# Altium PCB LD0.PcbDoc
Units mm, origin at the board's own origin, x right, y up, seen from the top; angles counter-clockwise.
Board outline 14.35 x 7.11 mm, 2 copper layers (Top Layer, Bottom Layer); 5 components, 3 nets, 13 pads, 20 vias.
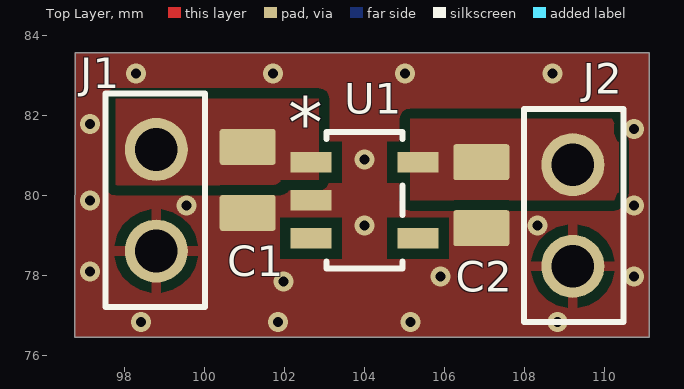
[diagram p0: Top Layer view]
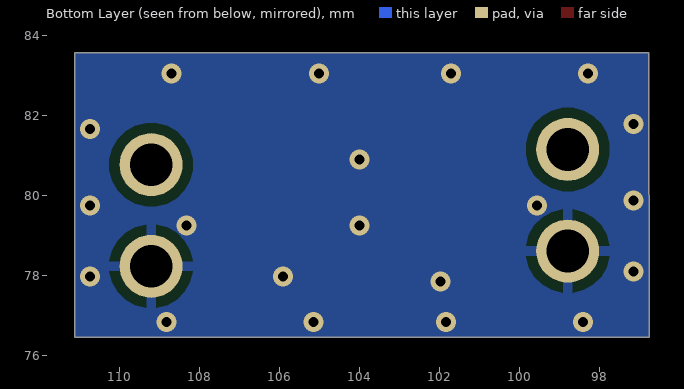
[diagram p1: Bottom Layer view, seen from below]
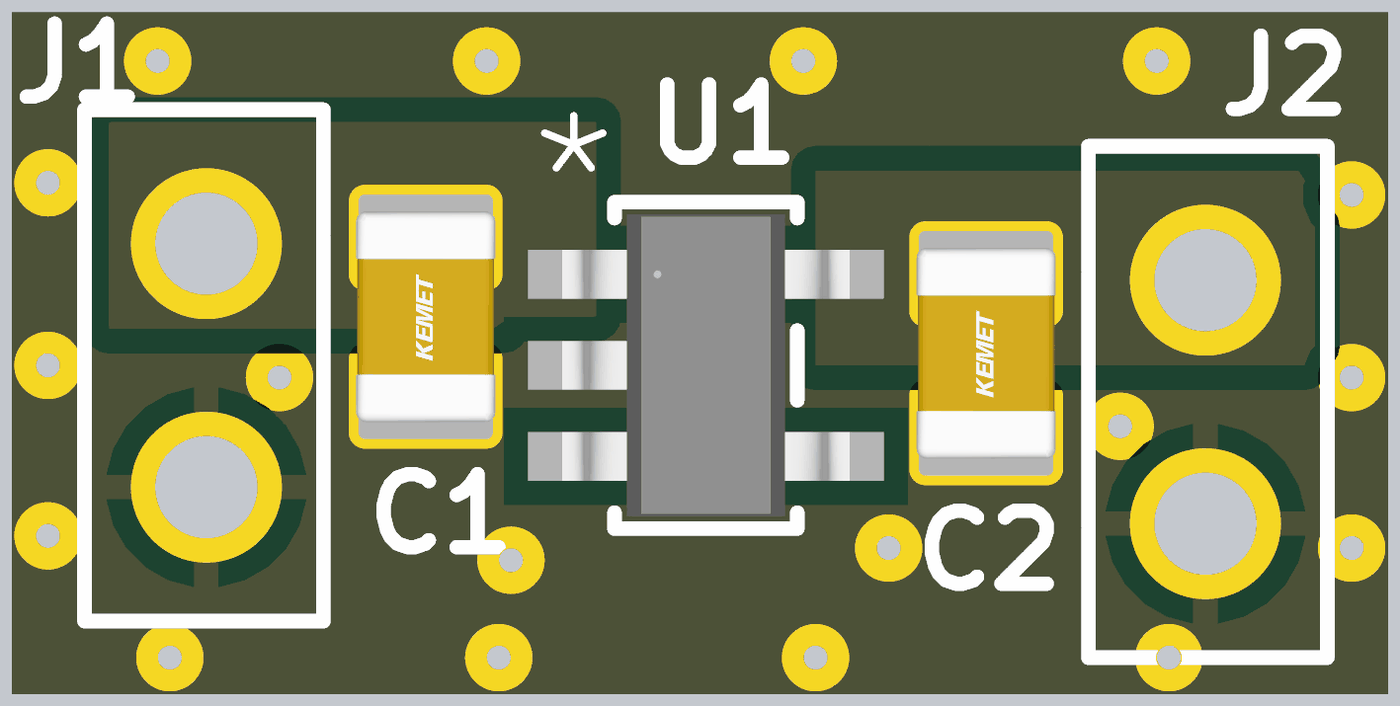
[diagram p2: 3D render of the assembled board from above, using the file's embedded part models]

## Layer stack, top to bottom
Top Solder: solder mask 0.0102, Solder Resist, Dk 3.5
Top Layer: signal copper 0.0356
Dielectric 1: dielectric 0.32, FR-4, Dk 4.8
Bottom Layer: signal copper 0.0356
Bottom Solder: solder mask 0.0102, Solder Resist, Dk 3.5

## Board outline
96.775,83.566 111.125,83.566 111.125,76.454 96.773,76.454

## Design rules (kind name [scope] priority, off if disabled: settings)
Clearance [All] p1: gap=0.254 ignorepadtopadclearanceinfootprint=FALSE except(0: Arc-Hole Track-Hole SMDPad-Hole THPad-Hole Via-Hole Fill-Hole Poly-Hole Region-Hole Text-Hole)
PolygonConnect [All] p1: connectstyle=Direct reliefconductorwidth=0.254 reliefentries=4 polygonreliefangle="90 Angle" airgapwidth=0.254
RoutingVias [All] p1: holewidth=0.711 width=1.27 viastyle="Through Hole" minholewidth=0.711 minwidth=1.27 maxholewidth=0.711 maxwidth=1.27
SolderMaskExpansion [All] p1: expansion=0.102 istentingtop=FALSE
Width [All] p1: maxlimit=0.254 minlimit=0.254 preferedwidth=0.254
30 further rules are at their usual default settings.

## Components (designator, comment, footprint, x,y, rotation, side; value= is the part's Value field where it differs from the comment)
C1 "GCM21BR71E105KA56L" CAP0805 101.092,80.391 r90 top value=1μF
C2 "GCM21BR71E105KA56L" CAP0805 106.934,80.01 r90 top value=1μF
J1 "22053021" CONN2_5-3021_MOL 98.806,78.613 r90 top
J2 "22053021" CONN2_5-3021_MOL 109.22,80.772 r270 top
U1 "NCP115ASN330T2G" TSOP-5-483-N_ONS 104.013,79.883 r0 top

## Footprints (in the part's own frame and the unit in brackets; to place one, negate y for a bottom-side part, rotate by r counter-clockwise, add the part's x,y. Pads: shape width x height; smd on the part's side, far side on the other; paste and mask are expansions set on the pad)
CAP0805 [mm] "Chip Capacitor, Body 2.0x1.2mm, Height 0.45mm, IPC Medium Density"
  rrect15% 0.9x1.4 smd: 1(-0.825,0) 2(0.825,0)
  body extent -1.1,-0.73 1.1,0.72, height 1.39
CONN2_5-3021_MOL [mil]
  round 62 hole 42 paste-31 mask+0: 1(0,0) 2(100,0)
  silkscreen extent -55,-48 155,50
TSOP-5-483-N_ONS [mil]
  rect 40.5x20 smd paste+0 mask+0: 1(-52.75,37.4) 2(-52.75,0) 3(-52.75,-37.4) 4(52.75,-37.4) 5(52.75,37.4)
  silkscreen extent -38,-67 38,67, body extent -59,-62 59,62, height 43

## Part data
C1 C2: "CAP CER 1UF 25V X7R 0805", Manufacturer 1=Murata, Supplier Part Number 1=490-4785-1-ND, Voltage Rating=25V, Manufacturer Part Number 1=GCM21BR71E105KA56L, Supplier 1=Digi-Key
J1 J2: "No Description Available", Mfr_Name="Molex Connector Corporation", RefDes=RefDes, Type=Type
U1: "No Description Available", Mfr_Name=onsemi, RefDes=RefDes, Type=Type

## Via types
v1: diameter 0.5, hole 0.25, Top Layer to Bottom Layer, 20 vias

## Nets (pads, with @x,y where several pads share a name; then routed paths per layer and width w, separated by ;. In a path a pad name is that pad's centre, name@x,y a point inside that pad or via, vN(x,y) a via of type N, cw(c..) or ccw(c..) an arc to the next point about the centre after c; other vN are vias at no path point)
3V3: C2.2 J2.1 U1.5
+5: C1.2 J1.2 U1.1
GND: C1.1 C2.1 J1.1 J2.2 U1.2
  other v1: 98.425,76.835 101.854,76.835 105.156,76.835 108.839,76.835 101.981,77.851 105.918,77.978 110.744,77.978 97.155,78.105 104.013,79.248 108.331,79.248 99.568,79.756 110.744,79.756 97.155,79.883 104.013,80.899 110.744,81.661 97.155,81.788 98.298,83.058 101.727,83.058 105.029,83.058 108.712,83.058
pads on no net: U1.3 U1.4

## Polygon pours and split planes (outlines as drawn)
GND on Top Layer "GND_L01_P023" (solid, pour order 23): 96.774,83.566 111.125,83.566 111.125,76.454 96.774,76.454
+5 on Top Layer "+5_L01_P018" (solid, pour order 18): 97.79,82.423 102.87,82.423 102.87,80.264 97.79,80.264
3V3 on Top Layer "3V3_L01_P019" (solid, pour order 19): 105.156,81.915 110.363,81.915 110.363,79.883 105.156,79.883
GND on Bottom Layer "GND_L02_P000" (solid, pour order 0): 96.774,83.566 111.125,83.566 111.125,76.454 96.774,76.454

## Text inside footprints (layer, text, board x,y; h text height)
U1: Top Overlay "*" at 102.102,81.214 h1.27; Mechanical 13 "*" at 103.124,80.122 h1.27